# Altium PCB acqboard.PcbDoc (part 3 of 5)
Units mil, origin at the board's own origin, x right, y up, seen from the top; angles counter-clockwise.
Board outline 7000 x 5250 mil, 4 copper layers (Top Layer, Internal Plane 1, Internal Plane 2, Bottom Layer); 629 components, 384 nets, 2086 pads, 785 vias.
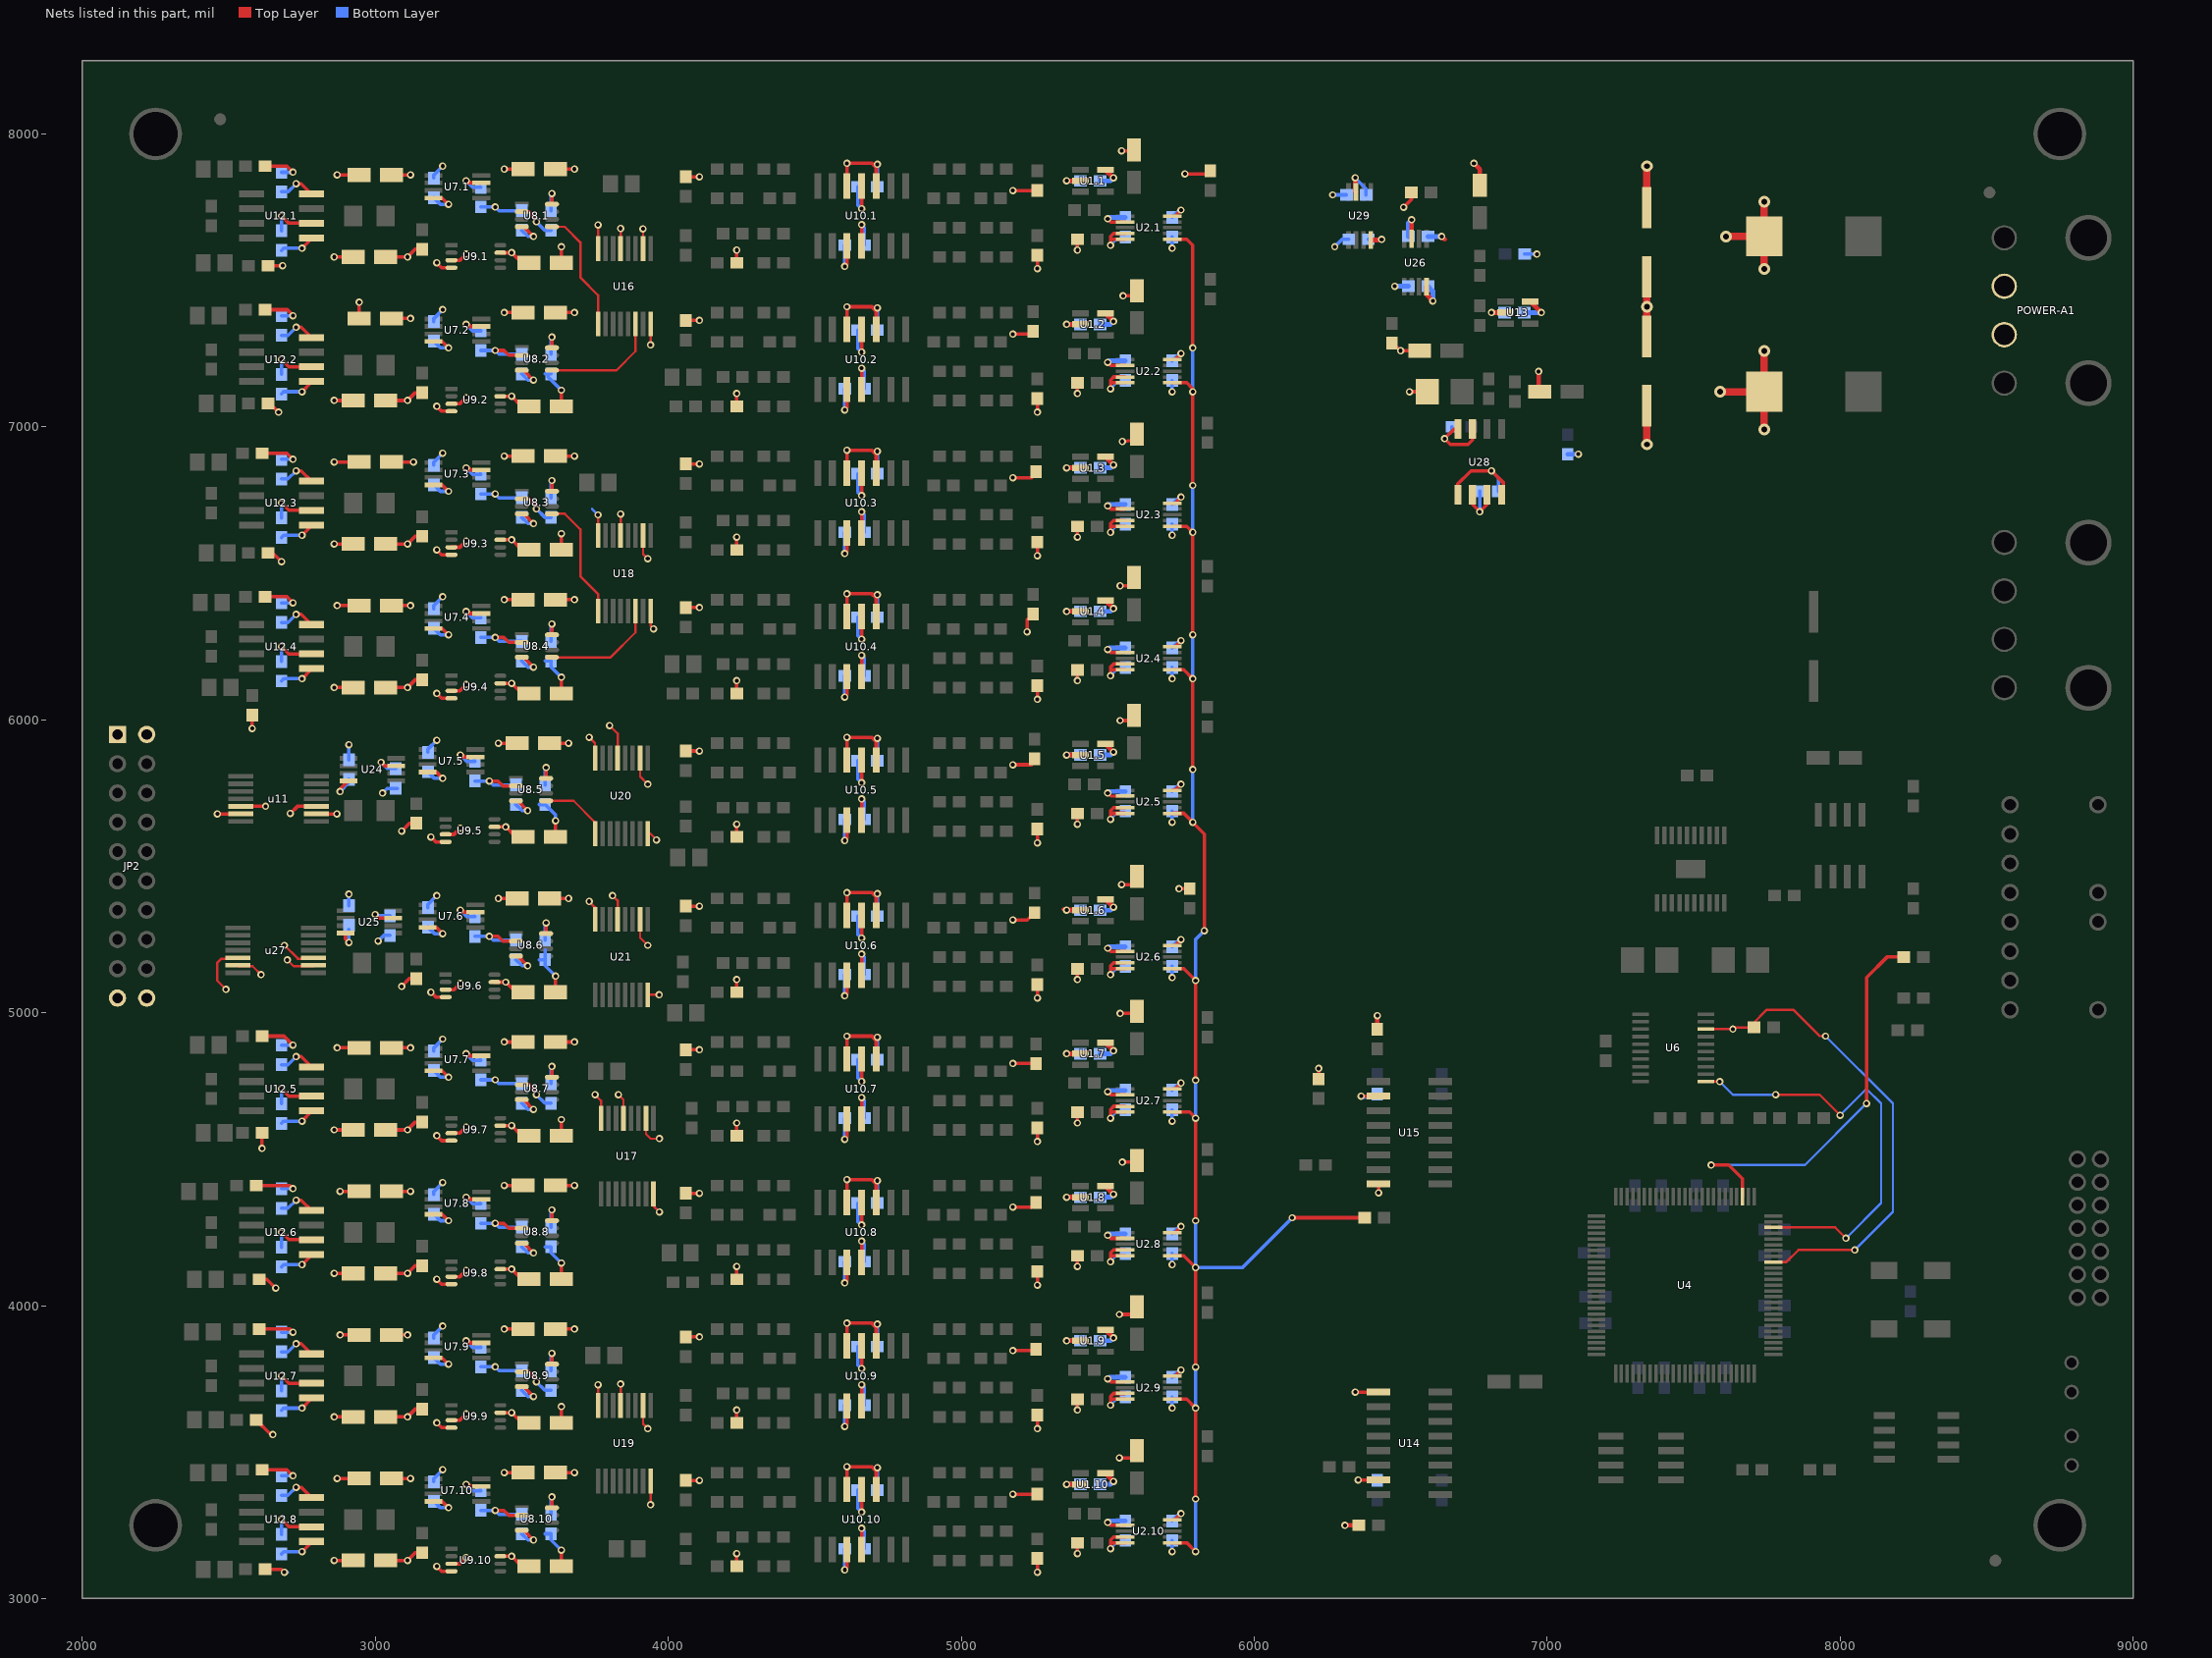
[diagram p5: the nets of this part, all layers, seen from the top]

## Via types
v1: diameter 25, hole 13.5, Top Layer to Bottom Layer, 768 vias
v2: diameter 40, hole 20, Top Layer to Bottom Layer, 13 vias
v3: diameter 40, hole 25, Top Layer to Bottom Layer, 4 vias

## Nets (pads, with @x,y where several pads share a name; then routed paths per layer and width w, separated by ;. In a path a pad name is that pad's centre, name@x,y a point inside that pad or via, vN(x,y) a via of type N, cw(c..) or ccw(c..) an arc to the next point about the centre after c; other vN are vias at no path point) (continued)
AGND: C1.1.2 C1.2.2 C1.3.2 C1.4.2 C1.5.2 C1.6.2 C1.7.2 C1.8.2 C1.9.2 C1.10.2 C2.1.2 C2.2.2 C2.3.2 C2.4.2 C2.5.2 C2.6.2 C2.7.2 C2.8.2 C2.9.2 C2.10.2 C3.1.1 C3.2.1 C3.3.1 C3.4.1 C3.5.1 C3.6.1 C3.7.1 C3.8.1 C3.9.1 C3.10.1 C4.1.1 C4.2.1 C4.3.1 C4.4.1 C4.5.1 C4.6.1 C4.7.1 C4.8.1 C4.9.1 C4.10.1 C5.1.1 C5.2.1 C5.3.1 C5.4.1 C5.5.1 C5.6.1 C5.7.1 C5.8.1 C5.9.1 C5.10.1 C6.2 C7.2 C27.2 C28.1.2 C28.2.2 C28.3.2 C28.4.2 C28.5.2 C28.6.2 C28.7.2 C28.8.2 C28.9.2 C28.10.2 C29.1.2 C29.2.2 C29.3.2 C29.4.2 C29.5.2 C29.6.2 C29.7.2 C29.8.2 C29.9.2 C29.10.2 C31.1.2 C31.2.2 C31.3.2 C31.4.2 C31.5.2 C31.6.2 C31.7.2 C31.8.2 C31.9.2 C31.10.2 C32.1.1 C32.2.1 C32.3.1 C32.4.1 C32.5.1 C32.6.1 C32.7.1 C32.8.1 C32.9.1 C32.10.1 C33.1.2 C33.2.2 C33.3.2 C33.4.2 C33.5.2 C33.6.2 C33.7.2 C33.8.2 C33.9.2 C33.10.2 C34.1.1 C34.2.1 C34.3.1 C34.4.1 C34.5.1 C34.6.1 C34.7.1 C34.8.1 C34.9.1 C34.10.1 C37.1.1 C37.2.1 C37.3.1 C37.4.1 C37.5.1 C37.6.1 C37.7.1 C37.8.1 C37.9.1 C37.10.1 C38.1.1 C38.2.1 C38.3.1 C38.4.1 C38.5.1 C38.6.1 C38.7.1 C38.8.1 C38.9.1 C38.10.1 C41.1.1 C41.2.1 C41.3.1 C41.4.1 C41.5.1 C41.6.1 C41.7.1 C41.8.1 C41.9.1 C41.10.1 C42.1.1 C42.2.1 C42.3.1 C42.4.1 C42.5.1 C42.6.1 C42.7.1 C42.8.1 C42.9.1 C42.10.1 C43.1.2 C43.2.2 C43.3.2 C43.4.2 C43.5.2 C43.6.2 C43.7.2 C43.8.2 C44.1.2 C44.2.2 C44.3.2 C44.4.2 C44.5.2 C44.6.2 C44.7.2 C44.8.2 C45.1.2 C45.2.2 C45.3.2 C45.4.2 C45.5.2 C45.6.2 C45.7.2 C45.8.2 C46.1.1 C46.2.1 C46.3.1 C46.4.1 C46.5.1 C46.6.1 C46.7.1 C46.8.1 C47.2 C49.1 C51.1 C54.2 C55.2 C56.2 C57.2 C58.1 C59.1 C60.2 C63.2 C64.2 C66.2 C69.2 C70.1 C71.1.1 C71.2.1 C71.3.1 C71.4.1 C71.5.1 C71.6.1 C71.7.1 C71.8.1 C71.9.1 C71.10.1 C72.1.2 C72.2.2 C72.3.2 C72.4.2 C72.5.2 C72.6.2 C72.7.2 C72.8.2 C72.9.2 C72.10.2 C74.2 C75.2 C76.2 C77.2 JP2.1 JP2.2 JP2.19 JP2.20 POWER-A1.2 POWER-A1.3 R13.1.1 R13.2.1 R13.3.1 R13.4.1 R13.5.1 R13.6.1 R13.7.1 R13.8.1 R13.9.1 R13.10.1 R29.1 R38.1 R45.1 R46.1 R49.1.2 R49.2.2 R49.3.2 R49.4.2 R49.5.2 R49.6.2 R49.7.2 R49.8.2 R50.1.1 R50.2.1 R50.3.1 R50.4.1 R50.5.1 R50.6.1 R50.7.1 R50.8.1 U1.1.2 U1.2.2 U1.3.2 U1.4.2 U1.5.2 U1.6.2 U1.7.2 U1.8.2 U1.9.2 U1.10.2 U2.1.4 U2.1.5 U2.2.4 U2.2.5 U2.3.4 U2.3.5 U2.4.4 U2.4.5 U2.5.4 U2.5.5 U2.6.4 U2.6.5 U2.7.4 U2.7.5 U2.8.4 U2.8.5 U2.9.4 U2.9.5 U2.10.4 U2.10.5 U8.1.2 U8.2.2 U8.3.2 U8.4.2 U8.5.2 U8.6.2 U8.7.2 U8.8.2 U8.9.2 U8.10.2 U9.1.3 U9.2.3 U9.3.3 U9.4.3 U9.5.3 U9.6.3 U9.7.3 U9.8.3 U9.9.3 U9.10.3 U10.1.3 U10.1.10 U10.1.12 U10.2.3 U10.2.10 U10.2.12 U10.3.3 U10.3.10 U10.3.12 U10.4.3 U10.4.10 U10.4.12 U10.5.3 U10.5.10 U10.5.12 U10.6.3 U10.6.10 U10.6.12 U10.7.3 U10.7.10 U10.7.12 U10.8.3 U10.8.10 U10.8.12 U10.9.3 U10.9.10 U10.9.12 U10.10.3 U10.10.10 U10.10.12 u11.13 U12.1.6 U12.2.6 U12.3.6 U12.4.6 U12.5.6 U12.6.6 U12.7.6 U12.8.6 U13.2 U14.9 U14.15 U15.2 U15.8 U16.8 U16.13 U17.8 U17.13 U18.8 U18.13 U19.8 U19.13 U20.8 U20.13 U21.8 U21.13 u27.13 U28.1 U28.4 U28.7 U28.8 | length 24643.4
  Top Layer w8: u27.13@2531.06,5158.82 2581.18,5158.82 v1(2610,5130) ; v1(3800,5980) 3827.2,5952.8 U20.13@3827.2,5868.94 ; v1(3810,5400) 3827.2,5382.8 U21.13@3827.2,5318.94 ; v1(3830,4720) 3847.2,4702.8 U17.13@3847.2,4638.94 ; U19.13@3837.2,3658.94 v1(3837.2,3732.8) ; U18.13@3837.2,6628.94 v1(3837.2,6702.8) ; U16.13@3837.2,7608.94 v1(3837.2,7677.2) ; U21.8@3929.57,5061.06 v1(3968.94,5061.06) ; U20.8@3929.57,5611.06 3938.94,5611.06 v1(3960,5590) ; v1(3939.57,3320.43) U19.8@3939.57,3401.06 ; U18.8@3939.57,6371.06 3939.57,6320.43 v1(3950,6310) ; U16.8@3939.57,7351.06 3939.57,7280.43 v1(3940,7280) ; U17.8@3949.57,4381.06 3949.57,4340.43 v1(3970,4320)
  Top Layer w12: v1(2461.18,5678.82) u11.13@2541.06,5678.82 ; v1(2580,5970) R50.4.1@2580,6016.54 ; R50.7.1@2593.46,3610 2643.46,3560 v1(2650,3560) ; R49.6.2@2593.46,4410 2708.3,4410 v1(2719.15,4399.15) ; R50.6.1@2600,4090 2630,4090 v1(2660,4060) ; R49.7.2@2603.46,3920 2708.3,3920 v1(2719.15,3909.15) ; R49.8.2@2613.46,3440 2698.3,3440 v1(2719.15,3419.15) ; v1(2613.46,4536.54) R50.5.1@2613.46,4590 ; R49.5.2@2613.46,4920 2688.3,4920 v1(2719.15,4889.15) ; R49.3.2@2613.46,6910 2698.3,6910 v1(2719.15,6889.15) ; R50.8.1@2623.46,3100 2680,3100 v1(2690,3090) ; R49.4.2@2623.46,6420 2698.3,6420 v1(2719.15,6399.15) ; R49.1.2@2623.46,7890 2698.3,7890 v1@2718.3,7870 ; R49.2.2@2625,7400 2700,7400 v1@2720,7380 ; R50.3.1@2633.46,6570 2650,6570 v1(2680,6540) ; R50.2.1@2633.46,7080 2640,7080 v1(2670,7050) ; R50.1.1@2633.46,7550 v1(2684,7550) ; v1(2680,3270) 2705,3245 U12.8.6@2782.36,3245 ; v1(2680,3760) 2705,3735 U12.7.6@2782.36,3735 ; v1(2680,4250) 2705,4225 U12.6.6@2782.36,4225 ; v1(2680,4740) 2705,4715 U12.5.6@2782.36,4715 ; v1(2680,6250) 2705,6225 U12.4.6@2782.36,6225 ; v1(2680,6740) 2705,6715 U12.3.6@2782.36,6715 ; v1(2680,7230) 2705,7205 U12.2.6@2782.36,7205 ; v1(2680,7720) 2705,7695 U12.1.6@2782.36,7695 ; C46.8.1@3035.12,3130 v1(3110,3130) 3136.54,3156.54 R13.10.1@3160,3156.54 ; C46.7.1@3035.12,3620 v1(3110,3620) 3136.54,3646.54 R13.9.1@3160,3646.54 ; C46.6.1@3035.12,4110 v1(3110,4110) 3136.54,4136.54 R13.8.1@3160,4136.54 ; C46.5.1@3035.12,4600 v1(3110,4600) 3136.54,4626.54 R13.7.1@3160,4626.54 ; C46.4.1@3035.12,6110 v1(3110,6110) 3136.54,6136.54 R13.4.1@3160,6136.54 ; C46.3.1@3035.12,6600 v1(3110,6600) 3136.54,6626.54 R13.3.1@3160,6626.54 ; C46.2.1@3035.12,7090 v1(3110,7090) 3136.54,7116.54 R13.2.1@3160,7116.54 ; C46.1.1@3035.12,7580 v1(3110,7580) 3136.54,7606.54 R13.1.1@3160,7606.54 ; C45.8.2@3055.12,3410 v1(3120,3410) ; C45.7.2@3055.12,3900 v1(3110,3900) ; C45.6.2@3055.12,4390 v1(3120,4390) ; C45.5.2@3055.12,4880 v1(3120,4880) ; C45.4.2@3055.12,6390 v1(3120,6390) ; C45.3.2@3055.12,6880 v1(3130,6880) ; C45.2.2@3055.12,7370 v1(3120,7370) ; C45.1.2@3055.12,7860 v1(3120,7860) ; v1(3090,5090) 3116.54,5116.54 R13.6.1@3140,5116.54 ; v1(3090,5620) 3116.54,5646.54 R13.5.1@3140,5646.54 ; U9.6.3@3240,5078.82 3268.82,5078.82 v1(3290,5100) ; U9.5.3@3240,5608.82 3268.82,5608.82 v1(3290,5630) ; U9.10.3@3260,3118.82 3288.82,3118.82 v1(3310,3140) ; U9.9.3@3260,3608.82 3288.82,3608.82 v1(3310,3630) ; U9.8.3@3260,4098.82 3288.82,4098.82 v1(3310,4120) ; U9.7.3@3260,4588.82 3288.82,4588.82 v1(3310,4610) ; U9.4.3@3260,6098.82 3288.82,6098.82 v1(3310,6120) ; U9.3.3@3260,6588.82 3288.82,6588.82 v1(3310,6610) ; U9.2.3@3260,7078.82 3288.82,7078.82 v1(3310,7100) ; U9.1.3@3260,7568.82 3288.82,7568.82 v1(3310,7590) ; v1@3390,5260 v1(3389.15,5260.85) 3419.15,5260.85 3435.59,5244.41 U8.6.2@3480,5244.41 ; v1@3390,5790 v1(3389.15,5790.85) 3419.15,5790.85 3435.59,5774.41 U8.5.2@3480,5774.41 ; v1(3409.15,3790.85) v1@3410,3790 ; v1(3409.15,4770.85) v1@3410,4770 ; v1(3409.15,6770.85) v1@3410,6770 ; v1(3409.15,7750.85) v1@3410,7750 ; v1@3410,3300 v1(3409.15,3300.85) 3439.15,3300.85 3455.59,3284.41 U8.10.2@3500,3284.41 ; v1@3410,4280 v1(3409.15,4280.85) 3439.15,4280.85 3455.59,4264.41 U8.8.2@3500,4264.41 ; v1@3410,6280 v1(3409.15,6280.85) 3439.15,6280.85 3455.59,6264.41 U8.4.2@3500,6264.41 ; v1@3410,7260 v1(3409.15,7260.85) 3439.15,7260.85 3455.59,7244.41 U8.2.2@3500,7244.41 ; v1(3420,5390) C33.6.2@3484.88,5390 ; v1(3420,5920) C33.5.2@3484.88,5920 ; v1(3440,3430) C33.10.2@3504.88,3430 ; v1(3440,3920) C33.9.2@3504.88,3920 ; v1(3440,4410) C33.8.2@3504.88,4410 ; v1(3440,4900) C33.7.2@3504.88,4900 ; v1(3440,6410) C33.4.2@3504.88,6410 ; v1(3440,6900) C33.3.2@3504.88,6900 ; v1(3440,7390) C33.2.2@3504.88,7390 ; v1(3440,7880) C33.1.2@3504.88,7880 ; U8.9.2@3500,3774.41 3525.59,3774.41 3550,3750 v1(3550,3740) ; U8.7.2@3500,4754.41 3525.59,4754.41 3550,4730 v1(3550,4720) ; U8.3.2@3500,6754.41 3525.59,6754.41 3550,6730 v1(3550,6720) ; U8.1.2@3500,7734.41 3525.59,7734.41 3550,7710 v1(3550,7700) ; C34.6.1@3615.12,5070 v1(3615.12,5125.12) ; C34.5.1@3615.12,5600 v1(3615.12,5655.12) ; C34.10.1@3635.12,3110 v1(3635.12,3165.12) ; C34.9.1@3635.12,3600 v1(3635.12,3655.12) ; C34.8.1@3635.12,4090 v1(3635.12,4145.12) ; C34.7.1@3635.12,4580 v1(3635.12,4635.12) ; C34.4.1@3635.12,6090 v1(3635.12,6145.12) ; C34.3.1@3635.12,6580 v1(3635.12,6635.12) ; C34.2.1@3635.12,7070 v1(3635.12,7125.12) ; C34.1.1@3635.12,7560 v1(3635.12,7615.12) ; C38.10.1@4060,3403.46 v1(4106.54,3403.46) ; C38.9.1@4060,3893.46 v1(4106.54,3893.46) ; C38.8.1@4060,4383.46 v1(4106.54,4383.46) ; C38.7.1@4060,4873.46 v1(4106.54,4873.46) ; C38.6.1@4060,5363.46 v1(4106.54,5363.46) ; C38.5.1@4060,5893.46 v1(4106.54,5893.46) ; C38.4.1@4060,6383.46 v1(4106.54,6383.46) ; C38.3.1@4060,6873.46 v1(4106.54,6873.46) ; C38.2.1@4060,7363.46 v1(4106.54,7363.46) ; C38.1.1@4060,7853.46 v1(4106.54,7853.46) ; C37.10.1@4233.46,3110 v1(4233.46,3153.46) ; C37.9.1@4233.46,3600 v1(4233.46,3643.46) ; C37.8.1@4233.46,4090 v1(4233.46,4133.46) ; C37.7.1@4233.46,4580 v1(4233.46,4623.46) ; C37.6.1@4233.46,5070 v1(4233.46,5113.46) ; C37.5.1@4233.46,5600 v1(4233.46,5643.46) ; C37.4.1@4233.46,6090 v1(4233.46,6133.46) ; C37.3.1@4233.46,6580 v1(4233.46,6623.46) ; C37.2.1@4233.46,7070 v1(4233.46,7113.46) ; C37.1.1@4233.46,7560 v1(4233.46,7603.46) ; v1(4602.22,3097.78) 4610,3105.56 U10.10.3@4610,3167.64 ; v1(4602.22,3587.78) 4610,3595.56 U10.9.3@4610,3657.64 ; v1(4602.22,4077.78) 4610,4085.56 U10.8.3@4610,4147.64 ; v1(4602.22,4567.78) 4610,4575.56 U10.7.3@4610,4637.64 ; v1(4602.22,5057.78) 4610,5065.56 U10.6.3@4610,5127.64 ; v1(4602.22,5587.78) 4610,5595.56 U10.5.3@4610,5657.64 ; v1(4602.22,6077.78) 4610,6085.56 U10.4.3@4610,6147.64 ; v1(4602.22,6567.78) 4610,6575.56 U10.3.3@4610,6637.64 ; v1(4602.22,7057.78) 4610,7065.56 U10.2.3@4610,7127.64 ; v1(4602.22,7547.78) 4610,7555.56 U10.1.3@4610,7617.64 ; U10.10.12@4610,3372.36 v1(4610,3450) 4695,3450 4710,3435 U10.10.10@4710,3372.36 ; U10.9.12@4610,3862.36 v1(4610,3940) 4695,3940 4710,3925 U10.9.10@4710,3862.36 ; U10.8.12@4610,4352.36 v1(4610,4430) 4695,4430 4710,4415 U10.8.10@4710,4352.36 ; U10.7.12@4610,4842.36 v1(4610,4920) 4695,4920 4710,4905 U10.7.10@4710,4842.36 ; U10.6.12@4610,5332.36 v1(4610,5410) 4695,5410 4710,5395 U10.6.10@4710,5332.36 ; U10.5.12@4610,5862.36 v1(4610,5940) 4695,5940 4710,5925 U10.5.10@4710,5862.36 ; U10.4.12@4610,6352.36 v1(4610,6430) 4695,6430 4710,6415 U10.4.10@4710,6352.36 ; U10.3.12@4610,6842.36 v1(4610,6920) 4695,6920 4710,6905 U10.3.10@4710,6842.36 ; U10.2.12@4610,7332.36 v1(4610,7410) 4695,7410 4710,7395 U10.2.10@4710,7332.36 ; U10.1.12@4610,7822.36 v1(4610,7900) 4695,7900 4710,7885 U10.1.10@4710,7822.36 ; v1@4710,3450 v1(4713.46,3446.54) ; v1@4710,3940 v1(4713.46,3936.54) ; v1@4710,4430 v1(4713.46,4426.54) ; v1@4710,4920 v1(4713.46,4916.54) ; v1@4710,5410 v1(4713.46,5406.54) ; v1@4710,5940 v1(4713.46,5936.54) ; v1@4710,6430 v1(4713.46,6426.54) ; v1@4710,6920 v1(4713.46,6916.54) ; v1@4710,7410 v1(4713.46,7406.54) ; v1@4710,7900 v1(4713.46,7896.54) ; v1(5176.54,3356.54) 5240,3356.54 ; v1(5176.54,3846.54) C41.9.1@5240,3846.54 ; v1(5176.54,4336.54) C41.8.1@5240,4336.54 ; v1(5176.54,4826.54) C41.7.1@5240,4826.54 ; v1(5176.54,5316.54) 5225,5316.54 C41.6.1@5250,5341.54 ; v1(5176.54,5846.54) C41.5.1@5240,5846.54 ; v1(5176.54,6826.54) C41.3.1@5240,6826.54 ; v1(5176.54,7316.54) C41.2.1@5240,7316.54 ; v1(5176.54,7806.54) 5240,7806.54 ; v1(5225,6300) 5225,6341.54 C41.4.1@5245,6361.54 ; v1(5260,3090) C42.10.1@5260,3136.54 ; v1(5260,3580) C42.9.1@5260,3626.54 ; v1(5260,4070) C42.8.1@5260,4116.54 ; v1(5260,4560) C42.7.1@5260,4606.54 ; v1(5260,5050) C42.6.1@5260,5096.54 ; v1(5260,5580) C42.5.1@5260,5626.54 ; v1(5260,6070) C42.4.1@5260,6116.54 ; v1(5260,6560) C42.3.1@5260,6606.54 ; v1(5260,7050) C42.2.1@5260,7096.54 ; v1(5260,7540) C42.1.1@5260,7586.54 ; 5347.4,5352.6 U1.6.2@5407.68,5352.6 ; v1(5396.54,3153.46) C4.10.1@5396.54,3190 ; v1(5396.54,3643.46) C4.9.1@5396.54,3680 ; v1(5396.54,4133.46) C4.8.1@5396.54,4170 ; v1(5396.54,4623.46) C4.7.1@5396.54,4660 ; v1(5396.54,5113.46) C4.6.1@5396.54,5150 ; v1(5396.54,5643.46) C4.5.1@5396.54,5680 ; v1(5396.54,6133.46) C4.4.1@5396.54,6170 ; v1(5396.54,6623.46) C4.3.1@5396.54,6660 ; v1(5396.54,7113.46) C4.2.1@5396.54,7150 ; v1(5396.54,7603.46) C4.1.1@5396.54,7640 ; v1(5510,3170) 5510,3200 5520.31,3210.32 U2.10.4@5559.29,3210.32 ; 5510,3190 5510.63,3190.63 U2.10.5@5559.29,3190.63 ; v1(5510,3660) 5510,3690 5520.31,3700.32 U2.9.4@5559.29,3700.32 ; 5510,3680 5510.63,3680.63 U2.9.5@5559.29,3680.63 ; v1(5510,4150) 5510,4180 5520.31,4190.31 U2.8.4@5559.29,4190.31 ; 5510,4170 5510.63,4170.63 U2.8.5@5559.29,4170.63 ; v1(5510,4640) 5510,4670 5520.31,4680.31 U2.7.4@5559.29,4680.31 ; 5510,4660 5510.63,4660.63 U2.7.5@5559.29,4660.63 ; v1(5510,5130) 5510,5160 5520.31,5170.31 U2.6.4@5559.29,5170.31 ; 5510,5150 5510.63,5150.63 U2.6.5@5559.29,5150.63 ; v1(5510,5660) 5510,5690 5520.31,5700.31 U2.5.4@5559.29,5700.31 ; 5510,5680 5510.63,5680.63 U2.5.5@5559.29,5680.63 ; v1(5510,6150) 5510,6180 5520.31,6190.31 U2.4.4@5559.29,6190.31 ; 5510,6170 5510.63,6170.63 U2.4.5@5559.29,6170.63 ; v1(5510,6640) 5510,6670 5520.31,6680.31 U2.3.4@5559.29,6680.31 ; 5510,6660 5510.63,6660.63 U2.3.5@5559.29,6660.63 ; v1(5510,7130) 5510,7160 5520.31,7170.31 U2.2.4@5559.29,7170.31 ; 5510,7150 5510.63,7150.63 U2.2.5@5559.29,7150.63 ; v1(5510,7620) 5510,7650 5520.31,7660.31 U2.1.4@5559.29,7660.31 ; 5510,7640 5510.63,7640.63 U2.1.5@5559.29,7640.63 ; v1(5540,3480) C2.10.2@5590,3480 ; v1(5540,3970) C2.9.2@5590,3970 ; v1(5542.6,4997.4) C2.7.2@5590,4997.4 ; v1(5542.6,5997.4) C2.5.2@5590,5997.4 ; v1(5542.6,6457.4) C2.4.2@5590,6457.4 ; v1(5547.4,5437.4) C2.6.2@5590,5437.4 ; v1(5547.4,7942.52) C2.1.2@5590,7942.52 ; v1(5550,4490) C2.8.2@5600,4490 ; v1(5550,6950) C2.3.2@5600,6955.12 ; v1(5552.6,7447.4) C2.2.2@5600,7447.4 ; v1(5743.46,5423.46) R45.1@5780,5423.46 ; v1(5763.46,7863.46) R46.1@5840,7863.46 ; R38.1@6220,4773.46 v1(6220,4810) ; v1(6345,3705) U14.9@6424.69,3705 ; v1(6355,3405) U14.15@6424.69,3405 ; v1(6365,4715) U15.2@6424.69,4715 ; v1(6424.69,4385.31) U15.8@6424.69,4415 ; C60.2@6470,7280 6480,7280 v1(6500,7260) C63.2@6560.94,7260 ; v1(6510,7750) 6536.54,7776.54 R29.1@6536.54,7800 ; v1(6530,7120) C7.2@6590.94,7120 ; U28.1@6695,6767.8 6695,6805 6740,6850 v1(6810,6850) 6850,6810 U28.4@6850,6770 ; U28.8@6695,6992.2 6682.2,6992.2 v1(6650,6960) 6670,6940 6730,6940 6745,6955 U28.7@6745,6992.2
  Top Layer w16: v1(5360,3390) U1.10.2@5407.68,3390 ; v1(5360,3880) U1.9.2@5407.68,3880 ; v1(5360,4370) U1.8.2@5407.68,4370 ; v1(5360,4860) U1.7.2@5407.68,4860 ; v1(5360,5350) U1.6.2@5407.68,5350 ; v1(5360,5880) U1.5.2@5407.68,5880 ; v1(5360,6370) U1.4.2@5407.68,6370 ; v1(5360,6860) U1.3.2@5407.68,6860 ; v1(5360,7350) U1.2.2@5407.68,7350 ; v1(5360,7840) U1.1.2@5407.68,7840 ; v1(6640,7650) 6650,7640 ; v1(6750,7900) 6770,7880 C54.2@6770,7829.06 ; v1(6810,7390) U13.2@6857.68,7390 ; C64.2@6970.94,7120 v1(6970.94,7189.06)
  Top Layer w25: C69.2@7340,7308.11 C70.1@7340,7511.89
  Bottom Layer w8: v1(3939.57,3320.43) v1@3940,3320 ; v1(5510,3170) 5530,3190 C5.10.1@5560,3190 ; v1(5510,3660) 5530,3680 C5.9.1@5560,3680 ; v1(5510,4150) 5530,4170 C5.8.1@5560,4170 ; v1(5510,4640) 5530,4660 C5.7.1@5560,4660 ; v1(5510,5130) 5530,5150 C5.6.1@5560,5150 ; v1(5510,5660) 5530,5680 C5.5.1@5560,5680 ; v1(5510,6150) 5530,6170 C5.4.1@5560,6170 ; v1(5510,6640) 5530,6660 C5.3.1@5560,6660 ; v1(5510,7130) 5530,7150 C5.2.1@5560,7150 ; v1(5510,7620) 5530,7640 C5.1.1@5560,7640 ; v1@6340,3700 v1(6345,3705) ; v1(6355,3405) 6356.54,3403.46 C51.1@6420,3403.46 ; v1(6365,4715) 6360,4710 6407.78,4710 C49.1@6420,4722.22 ; v1(6424.69,4385.31) v1@6430,4380
  Bottom Layer w12: C44.8.2@2680,3219.15 v1(2680,3270) ; C43.8.2@2680,3419.15 v1(2719.15,3419.15) ; C44.7.2@2680,3709.15 v1(2680,3760) ; C43.7.2@2680,3909.15 v1(2719.15,3909.15) ; C44.6.2@2680,4199.15 v1(2680,4250) ; C43.6.2@2680,4399.15 v1(2719.15,4399.15) ; C44.5.2@2680,4689.15 v1(2680,4740) ; C43.5.2@2680,4889.15 v1(2719.15,4889.15) ; C44.4.2@2680,6199.15 v1(2680,6250) ; C43.4.2@2680,6399.15 v1(2719.15,6399.15) ; C44.3.2@2680,6689.15 v1(2680,6740) ; C43.3.2@2680,6889.15 v1(2719.15,6889.15) ; C44.2.2@2680,7179.15 v1(2680,7230) ; C43.2.2@2680,7379.15 v1(2719.15,7379.15) ; C44.1.2@2680,7669.15 v1(2680,7720) ; C43.1.2@2680,7869.15 v1(2719.15,7869.15) ; v1(2690,3090) v1@2700,3090 ; C75.2@2910,5365.21 v1(2910,5405) ; C74.2@2910,5863.46 v1(2910,5915) ; v1(3010,5245) 3028.74,5263.74 C57.2@3050,5263.74 ; v1(3025,5750) 3040,5765 C55.2@3075,5765 ; C31.6.2@3180,5359.15 3180,5370 v1(3210,5400) ; C31.5.2@3180,5889.15 3180,5900 v1(3210,5930) ; C31.10.2@3200,3399.15 3200,3410 v1(3230,3440) ; C31.9.2@3200,3889.15 3200,3900 v1(3230,3930) ; C31.8.2@3200,4379.15 3200,4390 v1(3230,4420) ; C31.7.2@3200,4869.15 3200,4880 v1(3230,4910) ; C31.4.2@3200,6379.15 3200,6390 v1(3230,6420) ; C31.3.2@3200,6869.15 3200,6880 v1(3230,6910) ; C31.2.2@3200,7359.15 3200,7370 v1(3230,7400) ; C31.1.2@3200,7849.15 3200,7860 v1(3230,7890) ; C29.6.2@3340,5260.85 v1(3389.15,5260.85) 3402.22,5247.78 C32.6.1@3480,5247.78 ; C29.5.2@3340,5790.85 v1(3389.15,5790.85) 3402.22,5777.78 C32.5.1@3480,5777.78 ; C29.10.2@3360,3300.85 v1(3409.15,3300.85) 3422.22,3287.78 C32.10.1@3500,3287.78 ; C29.9.2@3360,3790.85 v1(3409.15,3790.85) 3422.22,3777.78 C32.9.1@3500,3777.78 ; C29.8.2@3360,4280.85 v1(3409.15,4280.85) 3422.22,4267.78 C32.8.1@3500,4267.78 ; C29.7.2@3360,4770.85 v1(3409.15,4770.85) 3422.22,4757.78 C32.7.1@3500,4757.78 ; C29.4.2@3360,6280.85 v1(3409.15,6280.85) 3422.22,6267.78 C32.4.1@3500,6267.78 ; C29.3.2@3360,6770.85 v1(3409.15,6770.85) 3422.22,6757.78 C32.3.1@3500,6757.78 ; C29.2.2@3360,7260.85 v1(3409.15,7260.85) 3422.22,7247.78 C32.2.1@3500,7247.78 ; C29.1.2@3360,7750.85 v1(3409.15,7750.85) 3422.22,7737.78 C32.1.1@3500,7737.78 ; v1(3550,3740) 3579.15,3710.85 C28.9.2@3600,3710.85 ; v1(3550,4720) 3579.15,4690.85 C28.7.2@3600,4690.85 ; v1(3550,6720) 3579.15,6690.85 C28.3.2@3600,6690.85 ; v1(3550,7700) 3579.15,7670.85 C28.1.2@3600,7670.85 ; 3559.15,5180.85 C28.6.2@3580,5180.85 ; 3559.15,5710.85 C28.5.2@3580,5710.85 3615.12,5675.73 v1(3615.12,5655.12) v1@3620,5660 ; 3579.15,3220.85 C28.10.2@3600,3220.85 3600,3200.24 v1(3635.12,3165.12) v1@3640,3170 ; 3579.15,4200.85 C28.8.2@3600,4200.85 3600,4180.24 v1(3635.12,4145.12) v1@3640,4150 ; 3579.15,6200.85 C28.4.2@3600,6200.85 3600,6180.24 v1(3635.12,6145.12) v1@3640,6150 ; 3579.15,7180.85 C28.2.2@3600,7180.85 ; 3580,5213.13 C28.6.2@3580,5160.24 ; C28.2.2@3590,7180.85 3590,7170.24 v1(3635.12,7125.12) v1@3640,7130 ; v1@3620,5130 v1(3615.12,5125.12) ; v1(3635.12,3655.12) v1@3640,3660 ; v1(3635.12,4635.12) v1@3640,4640 ; v1(3635.12,6635.12) v1@3640,6640 ; v1(3635.12,7615.12) v1@3640,7620 ; v1(4106.54,3403.46) v1@4110,3400 ; v1(4106.54,3893.46) v1@4110,3890 ; v1(4106.54,4383.46) v1@4110,4380 ; v1(4106.54,4873.46) v1@4110,4870 ; v1(4106.54,5363.46) v1@4110,5360 ; v1(4106.54,5893.46) v1@4110,5890 ; v1(4106.54,6383.46) v1@4110,6380 ; v1(4106.54,6873.46) v1@4110,6870 ; v1(4106.54,7363.46) v1@4110,7360 ; v1(4106.54,7853.46) v1@4110,7850 ; v1(4602.22,3097.78) C71.10.1@4602.22,3170 ; v1(4602.22,3587.78) C71.9.1@4602.22,3660 ; v1(4602.22,4077.78) C71.8.1@4602.22,4150 ; v1(4602.22,4567.78) C71.7.1@4602.22,4640 ; v1(4602.22,5057.78) C71.6.1@4602.22,5130 ; v1(4602.22,5587.78) C71.5.1@4602.22,5660 ; v1(4602.22,6077.78) C71.4.1@4602.22,6150 ; v1(4602.22,6567.78) C71.3.1@4602.22,6640 ; v1(4602.22,7057.78) C71.2.1@4602.22,7130 ; v1(4602.22,7547.78) C71.1.1@4602.22,7620 ; C72.10.2@4713.46,3370 v1(4713.46,3446.54) ; C72.9.2@4713.46,3860 v1(4713.46,3936.54) ; C72.8.2@4713.46,4350 v1(4713.46,4426.54) ; C72.7.2@4713.46,4840 v1(4713.46,4916.54) ; C72.6.2@4713.46,5330 v1(4713.46,5406.54) ; C72.5.2@4713.46,5860 v1(4713.46,5936.54) ; C72.4.2@4713.46,6350 v1(4713.46,6426.54) ; C72.3.2@4713.46,6840 v1(4713.46,6916.54) ; C72.2.2@4713.46,7330 v1(4713.46,7406.54) ; C72.1.2@4713.46,7820 v1(4713.46,7896.54) ; v1(5720,3160) C3.10.1@5720,3198.28 ; v1(5720,3650) C3.9.1@5720,3688.28 ; v1(5720,4140) C3.8.1@5720,4178.28 ; v1(5720,4630) C3.7.1@5720,4668.28 ; v1(5720,5120) C3.6.1@5720,5158.28 ; v1(5720,5650) C3.5.1@5720,5688.28 ; v1(5720,6140) C3.4.1@5720,6178.28 ; v1(5720,6630) C3.3.1@5720,6668.28 ; v1(5720,7120) C3.2.1@5720,7158.28 ; v1(5720,7610) C3.1.1@5720,7648.28 ; v1(6268,7792) C76.2@6314.79,7792 ; v1(6275,7615) 6300,7640 C77.2@6322.79,7640 ; v1(6650,6960) 6674.79,6984.79 C47.2@6674.79,7000 ; v1(6810,6850) 6833.46,6826.54 C27.2@6833.46,6780 ; C56.2@6923.46,7590 v1(6965,7590) ; C28.6.2@3580,5160.24 v1(3615.12,5125.12) ; C28.6.2@3580,5160.24 v1(3615.12,5125.12)
  Bottom Layer w16: v1(5360,3390) C1.10.2@5406.54,3390 ; v1(5360,3880) C1.9.2@5406.54,3880 ; v1(5360,4370) C1.8.2@5406.54,4370 ; v1(5360,4860) C1.7.2@5406.54,4860 ; v1(5360,5350) C1.6.2@5406.54,5350 ; v1(5360,5880) C1.5.2@5406.54,5880 ; v1(5360,6370) C1.4.2@5406.54,6370 ; v1(5360,6860) C1.3.2@5406.54,6860 ; v1(5360,7350) C1.2.2@5406.54,7350 ; v1(5360,7840) C1.1.2@5406.54,7840 ; v1(6480,7480) C59.1@6526.54,7480 ; C58.1@6593.46,7650 v1(6640,7650) ; v1(6810,7390) C6.2@6854.79,7390 ; C66.2@7070,6906.54 v1(7106.54,6906.54)
  other v2: 7340,7410
AVDD: C1.1.1 C1.2.1 C1.3.1 C1.4.1 C1.5.1 C1.6.1 C1.7.1 C1.8.1 C1.9.1 C1.10.1 C3.1.2 C3.2.2 C3.3.2 C3.4.2 C3.5.2 C3.6.2 C3.7.2 C3.8.2 C3.9.2 C3.10.2 C5.1.2 C5.2.2 C5.3.2 C5.4.2 C5.5.2 C5.6.2 C5.7.2 C5.8.2 C5.9.2 C5.10.2 C6.1 C27.1 C28.1.1 C28.2.1 C28.3.1 C28.4.1 C28.5.1 C28.6.1 C28.7.1 C28.8.1 C28.9.1 C28.10.1 C29.1.1 C29.2.1 C29.3.1 C29.4.1 C29.5.1 C29.6.1 C29.7.1 C29.8.1 C29.9.1 C29.10.1 C33.1.1 C33.2.1 C33.3.1 C33.4.1 C33.5.1 C33.6.1 C33.7.1 C33.8.1 C33.9.1 C33.10.1 C43.1.1 C43.2.1 C43.3.1 C43.4.1 C43.5.1 C43.6.1 C43.7.1 C43.8.1 C45.1.1 C45.2.1 C45.3.1 C45.4.1 C45.5.1 C45.6.1 C45.7.1 C45.8.1 C55.1 C57.1 C58.2 C69.1 C71.1.2 C71.2.2 C71.3.2 C71.4.2 C71.5.2 C71.6.2 C71.7.2 C71.8.2 C71.9.2 C71.10.2 C76.1 L2.2 R35.2 R39.2 U1.1.5 U1.2.5 U1.3.5 U1.4.5 U1.5.5 U1.6.5 U1.7.5 U1.8.5 U1.9.5 U1.10.5 U2.1.2 U2.1.10 U2.2.2 U2.2.10 U2.3.2 U2.3.10 U2.4.2 U2.4.10 U2.5.2 U2.5.10 U2.6.2 U2.6.10 U2.7.2 U2.7.10 U2.8.2 U2.8.10 U2.9.2 U2.9.10 U2.10.2 U2.10.10 U7.1.7 U7.2.7 U7.3.7 U7.4.7 U7.5.7 U7.6.7 U7.7.7 U7.8.7 U7.9.7 U7.10.7 U8.1.8 U8.2.8 U8.3.8 U8.4.8 U8.5.8 U8.6.8 U8.7.8 U8.8.8 U8.9.8 U8.10.8 U9.1.4 U9.2.4 U9.3.4 U9.4.4 U9.5.4 U9.6.4 U9.7.4 U9.8.4 U9.9.4 U9.10.4 U10.1.4 U10.2.4 U10.3.4 U10.4.4 U10.5.4 U10.6.4 U10.7.4 U10.8.4 U10.9.4 U10.10.4 u11.2 u11.12 U12.1.8 U12.2.8 U12.3.8 U12.4.8 U12.5.8 U12.6.8 U12.7.8 U12.8.8 U13.5 U16.10 U16.16 U17.10 U17.16 U18.10 U18.16 U19.10 U19.16 U20.10 U20.16 U21.10 U21.16 U24.7 U25.7 U26.7 u27.2 u27.12 U28.2 U28.3 U29.7 | length 12266.2
  Top Layer w8: v1(2490,5080) 2460,5110 2460,5170 2474.41,5184.41 u27.12@2531.06,5184.41 ; v1(2700,5180) 2721.18,5158.82 u27.2@2788.94,5158.82 ; v1(3730,5380) 3750.43,5359.57 U21.16@3750.43,5318.94 ; v1(3730,5940) 3750,5920 U20.16@3750,5890 ; v1(3750,4720) 3770.43,4699.57 U17.16@3770.43,4638.94 ; U19.16@3760.43,3658.94 v1(3760.43,3729.57) ; U18.16@3760.43,6628.94 v1(3760.43,6699.57) ; U16.16@3760.43,7608.94 v1(3760.43,7689.57) ; U21.10@3903.98,5318.94 3903.98,5256.02 v1(3930,5230) ; U20.10@3903.98,5868.94 3903.98,5806.02 v1(3930,5780) ; U19.10@3913.98,3658.94 3913.98,3596.02 v1(3930,3580) ; U18.10@3913.98,6628.94 3913.98,6566.02 v1(3930,6550) ; U16.10@3913.98,7608.94 v1(3913.98,7676.02) ; U17.10@3923.98,4638.94 3923.98,4586.02 3940,4570 v1(3970,4570)
  Top Layer w10: v1(5500,5750) 5510.31,5739.69 U2.5.2@5559.29,5739.69
  Top Layer w12: u11.12@2541.06,5704.41 v1(2625.59,5704.41) ; v1(2730,3380) 2747.36,3380 U12.8.8@2782.36,3345 ; v1(2730,3870) 2747.36,3870 U12.7.8@2782.36,3835 ; v1(2730,4360) 2747.36,4360 U12.6.8@2782.36,4325 ; v1(2730,4850) 2747.36,4850 U12.5.8@2782.36,4815 ; v1(2730,6360) 2747.36,6360 U12.4.8@2782.36,6325 ; v1(2730,6850) 2747.36,6850 U12.3.8@2782.36,6815 ; v1(2730,7340) 2747.36,7340 U12.2.8@2782.36,7305 ; v1(2730,7830) 2747.36,7830 U12.1.8@2782.36,7795 ; u11.2@2798.94,5678.82 v1(2868.82,5678.82) ; v1(2860,6880) C45.3.1@2944.88,6880 ; v1(2870,3410) C45.8.1@2944.88,3410 ; v1(2870,4880) C45.5.1@2944.88,4880 ; v1(2870,6390) C45.4.1@2944.88,6390 ; v1(2870,7860) C45.1.1@2944.88,7860 ; v1(2880,3900) C45.7.1@2944.88,3900 ; v1(2880,4390) C45.6.1@2944.88,4390 ; C45.2.1@2944.88,7370 v1(2944.88,7425.12) ; v1(3000,5335) 3012.2,5322.8 U25.7@3061.69,5322.8 ; v1(3020,5855) 3032.2,5842.8 U24.7@3071.69,5842.8 ; v1(3190,5070) 3206.77,5053.23 U9.6.4@3240,5053.23 ; v1(3190,5600) 3206.77,5583.23 U9.5.4@3240,5583.23 ; v1(3210,3110) 3226.77,3093.23 U9.10.4@3260,3093.23 ; v1(3210,3600) 3226.77,3583.23 U9.9.4@3260,3583.23 ; v1(3210,4090) 3226.77,4073.23 U9.8.4@3260,4073.23 ; v1(3210,4580) 3226.77,4563.23 U9.7.4@3260,4563.23 ; v1(3210,6090) 3226.77,6073.23 U9.4.4@3260,6073.23 ; v1(3210,6580) 3226.77,6563.23 U9.3.4@3260,6563.23 ; v1(3210,7070) 3226.77,7053.23 U9.2.4@3260,7053.23 ; v1(3210,7560) 3226.77,7543.23 U9.1.4@3260,7543.23 ; v1(3290,5350) 3298.18,5350 v1@3301.3,5346.89 ; v1(3290,5880) 3298.18,5880 v1@3301.3,5876.89 ; v1@3297.2,5342.8 U7.6.7@3341.69,5342.8 ; v1@3297.2,5872.8 U7.5.7@3341.69,5872.8 ; v1(3310,3390) 3318.18,3390 v1@3321.3,3386.89 ; v1(3310,3880) 3318.18,3880 v1@3321.3,3876.89 ; v1(3310,4370) 3318.18,4370 v1@3321.3,4366.89 ; v1(3310,4860) 3318.18,4860 v1@3321.3,4856.89 ; v1(3310,6370) 3318.18,6370 v1@3321.3,6366.89 ; v1(3310,6860) 3318.18,6860 v1@3321.3,6856.89 ; v1(3310,7350) 3318.18,7350 v1@3321.3,7346.89 ; v1(3310,7840) 3318.18,7840 v1@3321.3,7836.89 ; v1@3317.2,3382.8 U7.10.7@3361.69,3382.8 ; v1@3317.2,3872.8 U7.9.7@3361.69,3872.8 ; v1@3317.2,4362.8 U7.8.7@3361.69,4362.8 ; v1@3317.2,4852.8 U7.7.7@3361.69,4852.8 ; v1@3317.2,6362.8 U7.4.7@3361.69,6362.8 ; v1@3317.2,6852.8 U7.3.7@3361.69,6852.8 ; v1@3317.2,7342.8 U7.2.7@3361.69,7342.8 ; v1@3317.2,7832.8 U7.1.7@3361.69,7832.8 ; U8.6.8@3583.15,5270 v1(3583.15,5306.85) ; U8.5.8@3583.15,5800 v1(3583.15,5836.85) ; C33.6.1@3595.12,5390 v1(3660,5390) ; C33.5.1@3595.12,5920 v1(3660,5920) ; U8.10.8@3603.15,3310 v1(3603.15,3346.85) ; U8.9.8@3603.15,3800 v1(3603.15,3836.85) ; U8.8.8@3603.15,4290 v1(3603.15,4326.85) ; U8.7.8@3603.15,4780 v1(3603.15,4816.85) ; U8.4.8@3603.15,6290 v1(3603.15,6326.85) ; U8.3.8@3603.15,6780 v1(3603.15,6816.85) ; U8.2.8@3603.15,7270 v1(3603.15,7306.85) ; U8.1.8@3603.15,7760 v1(3603.15,7796.85) ; C33.10.1@3615.12,3430 v1(3680,3430) ; C33.9.1@3615.12,3920 v1(3680,3920) ; C33.8.1@3615.12,4410 v1(3680,4410) ; C33.7.1@3615.12,4900 v1(3680,4900) ; C33.4.1@3615.12,6410 v1(3680,6410) ; C33.3.1@3615.12,6900 v1(3680,6900) ; C33.2.1@3615.12,7390 v1(3680,7390) ; C33.1.1@3615.12,7880 v1(3680,7880) ; U10.10.4@4660,3167.64 v1(4660,3240) ; U10.9.4@4660,3657.64 v1(4660,3730) ; U10.8.4@4660,4147.64 v1(4660,4220) ; U10.7.4@4660,4637.64 v1(4660,4710) ; U10.6.4@4660,5127.64 v1(4660,5200) ; U10.5.4@4660,5657.64 v1(4660,5730) ; U10.4.4@4660,6147.64 v1(4660,6220) ; U10.3.4@4660,6637.64 v1(4660,6710) ; U10.2.4@4660,7127.64 v1(4660,7200) ; U10.1.4@4660,7617.64 v1(4660,7690) ; v1(5500,3260) 5510.31,3249.68 U2.10.2@5559.29,3249.68 ; v1(5500,3750) 5510.31,3739.68 U2.9.2@5559.29,3739.68 ; v1(5500,4240) 5510.31,4229.69 U2.8.2@5559.29,4229.69 ; v1(5500,4730) 5510.31,4719.69 U2.7.2@5559.29,4719.69 ; v1(5500,5220) 5510.31,5209.69 U2.6.2@5559.29,5209.69 ; v1(5500,6240) 5510.31,6229.69 U2.4.2@5559.29,6229.69 ; v1(5500,6730) 5510.31,6719.69 U2.3.2@5559.29,6719.69 ; v1(5500,7220) 5510.31,7209.69 U2.2.2@5559.29,7209.69 ; v1(5500,7710) 5510.31,7699.69 U2.1.2@5559.29,7699.69 ; U2.10.10@5720.71,3269.37 5729.37,3269.37 v1(5750,3290) ; U2.9.10@5720.71,3759.37 5729.37,3759.37 v1(5750,3780) ; U2.8.10@5720.71,4249.37 5729.37,4249.37 v1(5750,4270) ; U2.7.10@5720.71,4739.37 5729.37,4739.37 v1(5750,4760) ; U2.6.10@5720.71,5229.37 5729.37,5229.37 v1(5750,5250) ; U2.5.10@5720.71,5759.37 5729.37,5759.37 v1(5750,5780) ; U2.4.10@5720.71,6249.37 5729.37,6249.37 v1(5750,6270) ; U2.3.10@5720.71,6739.37 5729.37,6739.37 v1(5750,6760) ; U2.2.10@5720.71,7229.37 5729.37,7229.37 v1(5750,7250) ; U2.1.10@5720.71,7719.37 5729.37,7719.37 v1(5750,7740) ; U28.2@6745,6767.8 6745,6735 v1(6770,6710) 6795,6735 U28.3@6795,6767.8
  Top Layer w16: U1.10.5@5492.32,3427.4 5519.72,3400 v1(5520,3400) ; U1.9.5@5492.32,3917.4 5519.72,3890 v1(5520,3890) ; U1.8.5@5492.32,4407.4 5519.72,4380 v1(5520,4380) ; U1.7.5@5492.32,4897.4 5519.72,4870 v1(5520,4870) ; U1.6.5@5492.32,5387.4 5519.72,5360 v1(5520,5360) ; U1.5.5@5492.32,5917.4 5519.72,5890 v1(5520,5890) ; U1.4.5@5492.32,6407.4 5519.72,6380 v1(5520,6380) ; U1.3.5@5492.32,6897.4 5519.72,6870 v1(5520,6870) ; U1.2.5@5492.32,7387.4 5519.72,7360 v1(5520,7360) ; U1.1.5@5492.32,7877.4 5519.72,7850 v1(5520,7850) ; v1(6310,3250) R39.2@6356.54,3250 ; v1(6345,7850) 6345,7803.9 U29.7@6347.2,7801.69 ; R35.2@6420,4943.46 v1(6420,4990) ; U26.7@6537.2,7641.69 v1(6537.2,7707.2) ; U13.5@6942.32,7427.4 6942.6,7427.4 v1(6980,7390)
  Top Layer w25: v2(7340,6940) C69.1@7340,7071.89 ; v2(7590,7120) L2.2@7741,7120 ; v2(7741,6991) v2(7741,7259)
  Bottom Layer w8: 3740,6720 v1(3760.43,6699.57)
  Bottom Layer w12: C43.8.1@2680,3352.22 2702.22,3352.22 v1(2730,3380) ; C43.7.1@2680,3842.22 2702.22,3842.22 v1(2730,3870) ; C43.6.1@2680,4332.22 2702.22,4332.22 v1(2730,4360) ; C43.5.1@2680,4822.22 2702.22,4822.22 v1(2730,4850) ; C43.4.1@2680,6332.22 2702.22,6332.22 v1(2730,6360) ; C43.3.1@2680,6822.22 2702.22,6822.22 v1(2730,6850) ; C43.2.1@2680,7312.22 2702.22,7312.22 v1(2730,7340) ; C43.1.1@2680,7802.22 2702.22,7802.22 v1(2730,7830) ; v1(3000,5335) 3004.33,5330.67 C57.1@3050,5330.67 ; v1(3020,5855) 3041.54,5833.46 C55.1@3070,5833.46 ; v1(3290,5350) 3312.22,5327.78 C29.6.1@3340,5327.78 C29.6.1@3337.78,5330 ; v1(3290,5880) 3312.22,5857.78 C29.5.1@3340,5857.78 C29.5.1@3337.78,5860 ; v1(3310,3390) 3332.22,3367.78 C29.10.1@3360,3367.78 C29.10.1@3357.78,3370 ; v1(3310,3880) 3332.22,3857.78 C29.9.1@3360,3857.78 C29.9.1@3357.78,3860 ; v1(3310,4370) 3332.22,4347.78 C29.8.1@3360,4347.78 C29.8.1@3357.78,4350 ; v1(3310,4860) 3332.22,4837.78 C29.7.1@3360,4837.78 C29.7.1@3357.78,4840 ; v1(3310,6370) 3332.22,6347.78 C29.4.1@3360,6347.78 C29.4.1@3357.78,6350 ; v1(3310,6860) 3332.22,6837.78 C29.3.1@3360,6837.78 C29.3.1@3357.78,6840 ; v1(3310,7350) 3332.22,7327.78 C29.2.1@3360,7327.78 C29.2.1@3357.78,7330 ; v1(3310,7840) 3332.22,7817.78 C29.1.1@3360,7817.78 C29.1.1@3357.78,7820 ; C28.6.1@3580,5247.78 3580,5303.7 v1(3583.15,5306.85) ; C28.5.1@3580,5777.78 3580,5833.7 v1(3583.15,5836.85) ; C28.10.1@3600,3287.78 3600,3343.7 v1(3603.15,3346.85) ; C28.9.1@3600,3777.78 3600,3833.7 v1(3603.15,3836.85) ; C28.8.1@3600,4267.78 3600,4323.7 v1(3603.15,4326.85) ; C28.7.1@3600,4757.78 3600,4813.7 v1(3603.15,4816.85) ; C28.4.1@3600,6267.78 3600,6323.7 v1(3603.15,6326.85) ; C28.3.1@3600,6757.78 3600,6813.7 v1(3603.15,6816.85) ; C28.2.1@3600,7247.78 3600,7303.7 v1(3603.15,7306.85) ; C28.1.1@3600,7737.78 3600,7793.7 v1(3603.15,7796.85) ; v1(4660,3240) 4669.15,3230.85 C71.10.2@4669.15,3170 ; v1(4660,3730) 4669.15,3720.85 C71.9.2@4669.15,3660 ; v1(4660,4220) 4669.15,4210.85 C71.8.2@4669.15,4150 ; v1(4660,4710) 4669.15,4700.85 C71.7.2@4669.15,4640 ; v1(4660,5200) 4669.15,5190.85 C71.6.2@4669.15,5130 ; v1(4660,5730) 4669.15,5720.85 C71.5.2@4669.15,5660 ; v1(4660,6220) 4669.15,6210.85 C71.4.2@4669.15,6150 ; v1(4660,6710) 4669.15,6700.85 C71.3.2@4669.15,6640 ; v1(4660,7200) 4669.15,7190.85 C71.2.2@4669.15,7130 ; v1(4660,7690) 4669.15,7680.85 C71.1.2@4669.15,7620 ; C3.10.2@5720,3265.21 5744.79,3290 v1(5750,3290) ; C3.9.2@5720,3755.21 5744.79,3780 v1(5750,3780) ; C3.8.2@5720,4245.21 5744.79,4270 v1(5750,4270) ; C3.7.2@5720,4735.21 5744.79,4760 v1(5750,4760) ; C3.6.2@5720,5225.21 5744.79,5250 v1(5750,5250) ; C3.5.2@5720,5755.21 5744.79,5780 v1(5750,5780) ; C3.4.2@5720,6245.21 5744.79,6270 v1(5750,6270) ; C3.3.2@5720,6735.21 5744.79,6760 v1(5750,6760) ; C3.2.2@5720,7225.21 5744.79,7250 v1(5750,7250) ; C3.1.2@5720,7715.21 5744.79,7740 v1(5750,7740) ; v1(6345,7850) 6381.72,7813.28 C76.1@6381.72,7792 ; v1(6770,6710) C27.1@6770,6780
  Bottom Layer w16: C1.10.1@5473.46,3390 5510,3390 v1(5520,3400) ; C1.9.1@5473.46,3880 5510,3880 v1(5520,3890) ; C1.8.1@5473.46,4370 5510,4370 v1(5520,4380) ; C1.7.1@5473.46,4860 5510,4860 v1(5520,4870) ; C1.6.1@5473.46,5350 5510,5350 v1(5520,5360) ; C1.5.1@5473.46,5880 5510,5880 v1(5520,5890) ; C1.4.1@5473.46,6370 5510,6370 v1(5520,6380) ; C1.3.1@5473.46,6860 5510,6860 v1(5520,6870) ; C1.2.1@5473.46,7350 5510,7350 v1(5520,7360) ; C1.1.1@5473.46,7840 5510,7840 v1(5520,7850) ; v1(5500,3260) 5505.21,3265.21 C5.10.2@5560,3265.21 ; v1(5500,3750) 5505.21,3755.21 C5.9.2@5560,3755.21 ; v1(5500,4240) 5505.21,4245.21 C5.8.2@5560,4245.21 ; v1(5500,4730) 5505.21,4735.21 C5.7.2@5560,4735.21 ; v1(5500,5220) 5505.21,5225.21 C5.6.2@5560,5225.21 ; v1(5500,5750) 5505.21,5755.21 C5.5.2@5560,5755.21 ; v1(5500,6240) 5505.21,6245.21 C5.4.2@5560,6245.21 ; v1(5500,6730) 5505.21,6735.21 C5.3.2@5560,6735.21 ; v1(5500,7220) 5505.21,7225.21 C5.2.2@5560,7225.21 ; v1(5500,7710) 5505.21,7715.21 C5.1.2@5560,7715.21 ; C58.2@6526.54,7650 6526.54,7696.54 v1(6537.2,7707.2) ; C6.1@6921.72,7390 v1(6980,7390)
AVSS: C31.1.1 C31.2.1 C31.3.1 C31.4.1 C31.5.1 C31.6.1 C31.7.1 C31.8.1 C31.9.1 C31.10.1 C32.1.2 C32.2.2 C32.3.2 C32.4.2 C32.5.2 C32.6.2 C32.7.2 C32.8.2 C32.9.2 C32.10.2 C34.1.2 C34.2.2 C34.3.2 C34.4.2 C34.5.2 C34.6.2 C34.7.2 C34.8.2 C34.9.2 C34.10.2 C44.1.1 C44.2.1 C44.3.1 C44.4.1 C44.5.1 C44.6.1 C44.7.1 C44.8.1 C46.1.2 C46.2.2 C46.3.2 C46.4.2 C46.5.2 C46.6.2 C46.7.2 C46.8.2 C59.2 C70.2 C72.1.1 C72.2.1 C72.3.1 C72.4.1 C72.5.1 C72.6.1 C72.7.1 C72.8.1 C72.9.1 C72.10.1 C74.1 C75.1 C77.1 L3.2 U7.1.4 U7.2.4 U7.3.4 U7.4.4 U7.5.4 U7.6.4 U7.7.4 U7.8.4 U7.9.4 U7.10.4 U8.1.4 U8.2.4 U8.3.4 U8.4.4 U8.5.4 U8.6.4 U8.7.4 U8.8.4 U8.9.4 U8.10.4 U9.1.7 U9.2.7 U9.3.7 U9.4.7 U9.5.7 U9.6.7 U9.7.7 U9.8.7 U9.9.7 U9.10.7 U10.1.11 U10.2.11 U10.3.11 U10.4.11 U10.5.11 U10.6.11 U10.7.11 U10.8.11 U10.9.11 U10.10.11 u11.3 U12.1.5 U12.2.5 U12.3.5 U12.4.5 U12.5.5 U12.6.5 U12.7.5 U12.8.5 U24.4 U25.4 U26.4 u27.3 U29.4 | length 7504.4
  Top Layer w8: v1(2690,5230) 2735.59,5184.41 u27.3@2788.94,5184.41
  Top Layer w12: v1(2710,5680) 2734.41,5704.41 u11.3@2798.94,5704.41 ; v1(2750,3160) 2782.36,3192.36 U12.8.5@2782.36,3195 ; v1(2750,3650) 2782.36,3682.36 U12.7.5@2782.36,3685 ; v1(2750,4140) 2782.36,4172.36 U12.6.5@2782.36,4175 ; v1(2750,4630) 2782.36,4662.36 U12.5.5@2782.36,4665 ; v1(2750,6140) 2782.36,6172.36 U12.4.5@2782.36,6175 ; v1(2750,6630) 2782.36,6662.36 U12.3.5@2782.36,6665 ; v1(2750,7120) 2782.36,7152.36 U12.2.5@2782.36,7155 ; v1(2750,7610) 2782.36,7642.36 U12.1.5@2782.36,7645 ; v1(2860,3130) C46.8.2@2924.88,3130 ; v1(2860,3620) C46.7.2@2924.88,3620 ; v1(2860,4110) C46.6.2@2924.88,4110 ; v1(2860,4600) C46.5.2@2924.88,4600 ; v1(2860,6110) C46.4.2@2924.88,6110 ; v1(2860,6600) C46.3.2@2924.88,6600 ; v1(2860,7090) C46.2.2@2924.88,7090 ; v1(2860,7580) C46.1.2@2924.88,7580 ; v1(2880,5755) 2880,5763.31 U24.4@2908.31,5791.61 ; U25.4@2898.31,5271.61 2898.31,5251.69 v1(2910,5240) ; U7.6.4@3178.31,5291.61 3208.39,5291.61 v1(3230,5270) ; U7.5.4@3178.31,5821.61 3208.39,5821.61 v1(3230,5800) ; U7.10.4@3198.31,3331.61 3228.39,3331.61 v1(3250,3310) ; U7.9.4@3198.31,3821.61 3228.39,3821.61 v1(3250,3800) ; U7.8.4@3198.31,4311.61 3228.39,4311.61 v1(3250,4290) ; U7.7.4@3198.31,4801.61 3228.39,4801.61 v1(3250,4780) ; U7.4.4@3198.31,6311.61 3228.39,6311.61 v1(3250,6290) ; U7.3.4@3198.31,6801.61 3228.39,6801.61 v1(3250,6780) ; U7.2.4@3198.31,7291.61 3228.39,7291.61 v1(3250,7270) ; U7.1.4@3198.31,7781.61 3228.39,7781.61 v1(3250,7760) ; U9.6.7@3406.93,5104.41 v1(3445.59,5104.41) 3480,5070 C34.6.2@3504.88,5070 ; U9.5.7@3406.93,5634.41 v1(3445.59,5634.41) 3480,5600 C34.5.2@3504.88,5600 ; U9.10.7@3426.93,3144.41 v1(3465.59,3144.41) 3500,3110 C34.10.2@3524.88,3110 ; U9.9.7@3426.93,3634.41 v1(3465.59,3634.41) 3500,3600 C34.9.2@3524.88,3600 ; U9.8.7@3426.93,4124.41 v1(3465.59,4124.41) 3500,4090 C34.8.2@3524.88,4090 ; U9.7.7@3426.93,4614.41 v1(3465.59,4614.41) 3500,4580 C34.7.2@3524.88,4580 ; U9.4.7@3426.93,6124.41 v1(3465.59,6124.41) 3500,6090 C34.4.2@3524.88,6090 ; U9.3.7@3426.93,6614.41 v1(3465.59,6614.41) 3500,6580 C34.3.2@3524.88,6580 ; U9.2.7@3426.93,7104.41 v1(3465.59,7104.41) 3500,7070 C34.2.2@3524.88,7070 ; U9.1.7@3426.93,7594.41 v1(3465.59,7594.41) 3500,7560 C34.1.2@3524.88,7560 ; U8.6.4@3480,5193.23 3486.77,5193.23 v1(3520,5160) ; U8.5.4@3480,5723.23 3486.77,5723.23 v1(3520,5690) ; U8.10.4@3500,3233.23 3506.77,3233.23 v1(3540,3200) ; U8.9.4@3500,3723.23 3506.77,3723.23 v1(3540,3690) ; U8.8.4@3500,4213.23 3506.77,4213.23 v1(3540,4180) ; U8.7.4@3500,4703.23 3506.77,4703.23 v1(3540,4670) ; U8.4.4@3500,6213.23 3506.77,6213.23 v1(3540,6180) ; U8.3.4@3500,6703.23 3506.77,6703.23 v1(3540,6670) ; U8.2.4@3500,7193.23 3506.77,7193.23 v1(3540,7160) ; U8.1.4@3500,7683.23 3506.77,7683.23 v1(3540,7650) ; v1(4660,3295) U10.10.11@4660,3372.36 ; v1(4660,3785) U10.9.11@4660,3862.36 ; v1(4660,4275) U10.8.11@4660,4352.36 ; v1(4660,4765) U10.7.11@4660,4842.36 ; v1(4660,5255) U10.6.11@4660,5332.36 ; v1(4660,5785) U10.5.11@4660,5862.36 ; v1(4660,6275) U10.4.11@4660,6352.36 ; v1(4660,6765) U10.3.11@4660,6842.36 ; v1(4660,7255) U10.2.11@4660,7332.36 ; v1(4660,7745) U10.1.11@4660,7822.36
  Top Layer w16: U29.4@6398.39,7638.31 6433.31,7638.31 v1(6435,7640) ; U26.4@6588.39,7478.31 6588.39,7451.61 v1(6610,7430)
  Top Layer w25: C70.2@7340,7760 v2(7340,7890) ; v2(7610,7650) L3.2@7741,7650 ; v2(7741,7539) v2(7741,7769)
  Bottom Layer w12: C44.8.1@2680,3152.22 2687.78,3160 v1(2750,3160) ; C44.7.1@2680,3642.22 2687.78,3650 v1(2750,3650) ; C44.6.1@2680,4132.22 2687.78,4140 v1(2750,4140) ; C44.5.1@2680,4622.22 2687.78,4630 v1(2750,4630) ; C44.4.1@2680,6132.22 2687.78,6140 v1(2750,6140) ; C44.3.1@2680,6622.22 2687.78,6630 v1(2750,6630) ; C44.2.1@2680,7112.22 2687.78,7120 v1(2750,7120) ; C44.1.1@2680,7602.22 2687.78,7610 v1(2750,7610) ; v1(2880,5755) 2910,5785 C74.1@2910,5796.54 ; v1(2910,5240) C75.1@2910,5285 ; C31.6.1@3180,5292.22 3202.22,5270 v1(3230,5270) ; C31.5.1@3180,5822.22 3202.22,5800 v1(3230,5800) ; C31.10.1@3200,3332.22 3222.22,3310 v1(3250,3310) ; C31.9.1@3200,3822.22 3222.22,3800 v1(3250,3800) ; C31.8.1@3200,4312.22 3222.22,4290 v1(3250,4290) ; C31.7.1@3200,4802.22 3222.22,4780 v1(3250,4780) ; C31.4.1@3200,6312.22 3222.22,6290 v1(3250,6290) ; C31.3.1@3200,6802.22 3222.22,6780 v1(3250,6780) ; C31.2.1@3200,7292.22 3222.22,7270 v1(3250,7270) ; C31.1.1@3200,7782.22 3222.22,7760 v1(3250,7760) ; C32.6.2@3480,5180.85 3500.85,5160 v1(3520,5160) ; C32.5.2@3480,5710.85 3500.85,5690 v1(3520,5690) ; C32.10.2@3500,3220.85 3520.85,3200 v1(3540,3200) ; C32.9.2@3500,3710.85 3520.85,3690 v1(3540,3690) ; C32.8.2@3500,4200.85 3520.85,4180 v1(3540,4180) ; C32.7.2@3500,4690.85 3520.85,4670 v1(3540,4670) ; C32.4.2@3500,6200.85 3520.85,6180 v1(3540,6180) ; C32.3.2@3500,6690.85 3520.85,6670 v1(3540,6670) ; C32.2.2@3500,7180.85 3520.85,7160 v1(3540,7160) ; C32.1.2@3500,7670.85 3520.85,7650 v1(3540,7650) ; C72.10.1@4646.54,3370 4646.54,3308.46 v1(4660,3295) ; C72.9.1@4646.54,3860 4646.54,3798.46 v1(4660,3785) ; C72.8.1@4646.54,4350 4646.54,4288.46 v1(4660,4275) ; C72.7.1@4646.54,4840 4646.54,4778.46 v1(4660,4765) ; C72.6.1@4646.54,5330 4646.54,5268.46 v1(4660,5255) ; C72.5.1@4646.54,5860 4646.54,5798.46 v1(4660,5785) ; C72.4.1@4646.54,6350 4646.54,6288.46 v1(4660,6275) ; C72.3.1@4646.54,6840 4646.54,6778.46 v1(4660,6765) ; C72.2.1@4646.54,7330 4646.54,7268.46 v1(4660,7255) ; C72.1.1@4646.54,7820 4646.54,7758.46 v1(4660,7745) ; C77.1@6389.72,7640 v1(6435,7640)
  Bottom Layer w16: C59.2@6593.46,7480 6610,7463.46 v1(6610,7430)
C\O\N\V\S\T\: R40.1 U2.1.6 U2.2.6 U2.3.6 U2.4.6 U2.5.6 U2.6.6 U2.7.6 U2.8.6 U2.9.6 U2.10.6 | length 6007.4
  Top Layer w12: U2.10.6@5720.71,3190.63 5769.37,3190.63 v1(5800,3160) ; U2.9.6@5720.71,3680.63 5769.37,3680.63 v1(5800,3650) v1(5800,3340) ; U2.8.6@5720.71,4170.63 5759.37,4170.63 v1(5800,4130) v1(5800,3790) ; U2.7.6@5720.71,4660.63 5779.37,4660.63 v1(5800,4640) v1(5800,4290) ; U2.6.6@5720.71,5150.63 5759.37,5150.63 v1(5800,5110) v1(5800,4770) ; U2.5.6@5720.71,5680.63 5759.37,5680.63 5830,5610 v1(5830,5280) ; U2.4.6@5720.71,6170.63 5759.37,6170.63 v1(5790,6140) v1(5790,5830) ; U2.3.6@5720.71,6660.63 5769.37,6660.63 v1(5790,6640) v1(5790,6290) ; U2.2.6@5720.71,7150.63 5769.37,7150.63 5790,7130 v1(5790,6800) ; U2.1.6@5720.71,7640.63 5769.37,7640.63 5790,7620 v1(5790,7270) ; v1(6130,4300) R40.1@6376.54,4300
  Bottom Layer w12: v1(5790,5650) v1(5790,5830) ; v1(5790,6140) v1(5790,6290) ; v1(5790,6640) v1(5790,6800) ; v1(5790,7120) v1(5790,7270) ; v1(5800,3160) v1(5800,3340) ; v1(5800,3650) v1(5800,3790) ; v1(5800,4290) v1(5800,4130) 5960,4130 v1(6130,4300) ; v1(5800,4640) v1(5800,4770) ; v1(5800,5110) 5800,5250 v1(5830,5280)
FDIN: U4.48 U6.1 | length 1477.1
  Top Layer w8: U6.1@7541.22,4764.84 v1(7589.16,4764.84) ; U4.48@7772.17,4266.85 7983.15,4266.85 v1(8020,4230) ; v1(7780,4720) 7930,4720 v1(8000,4650)
  Bottom Layer w8: v1(7589.16,4764.84) 7634,4720 v1(7780,4720) ; v1(8000,4650) 8090,4740 8140,4690 8140,4350 v1(8020,4230)
FIBERIN: R3.1 U4.53 | length 1389.8
  Top Layer w12: v1(7560,4480) 7620,4480 7666.85,4433.15 U4.53@7666.85,4372.17 ; v1(8090,4690) 8090,5120 8160,5190 R3.1@8216.54,5190
  Bottom Layer w8: v1(7560,4480) 7880,4480 v1(8090,4690)
FINIT_B: R8.1 U4.42 U6.8 | length 1649.8
  Top Layer w8: U6.8@7541.22,4943.98 v1(7633.98,4943.98) 7640,4950 R8.1@7706.54,4950 ; R8.1@7700,4960 7750,5010 7840,5010 7930,4920 v1(7950,4920) ; U4.42@7772.17,4148.74 7816.22,4148.74 7857.48,4190 v1(8050,4190)
  Bottom Layer w8: v1(7950,4920) 8180,4690 8180,4320 v1(8050,4190)
GA1: U8.1.5 U16.1 | length 422.9
  Top Layer w8: U8.1.5@3603.15,7683.23 3646.77,7683.23 3700,7630 3700,7510 3760.43,7449.57 U16.1@3760.43,7351.06
GA2: U8.2.5 U16.6 | length 404.9
  Top Layer w8: U8.2.5@3603.15,7193.23 3823.23,7193.23 3888.39,7258.39 U16.6@3888.39,7351.06
GA3: U8.3.5 U18.1 | length 422.9
  Top Layer w8: U8.3.5@3603.15,6703.23 3646.77,6703.23 3700,6650 3700,6490 3760.43,6429.57 U18.1@3760.43,6371.06
GA4: U8.4.5 U18.6 | length 393.2
  Top Layer w8: U8.4.5@3603.15,6213.23 3803.23,6213.23 3888.39,6298.39 U18.6@3888.39,6371.06
GA5: U8.5.5 U20.1 | length 236.3
  Top Layer w8: U8.5.5@3583.15,5723.23 3676.77,5723.23 3750.43,5649.57 U20.1@3750.43,5611.06